# Altium PCB PCB1.PcbDoc
Units mm, origin at the board's own origin, x right, y up, seen from the top; angles counter-clockwise.
Board outline 30 x 30 mm, 2 copper layers (Top Layer, Bottom Layer); 20 components, 12 nets, 49 pads, 0 vias.
Unrouted connection lines stored in the file: 34.
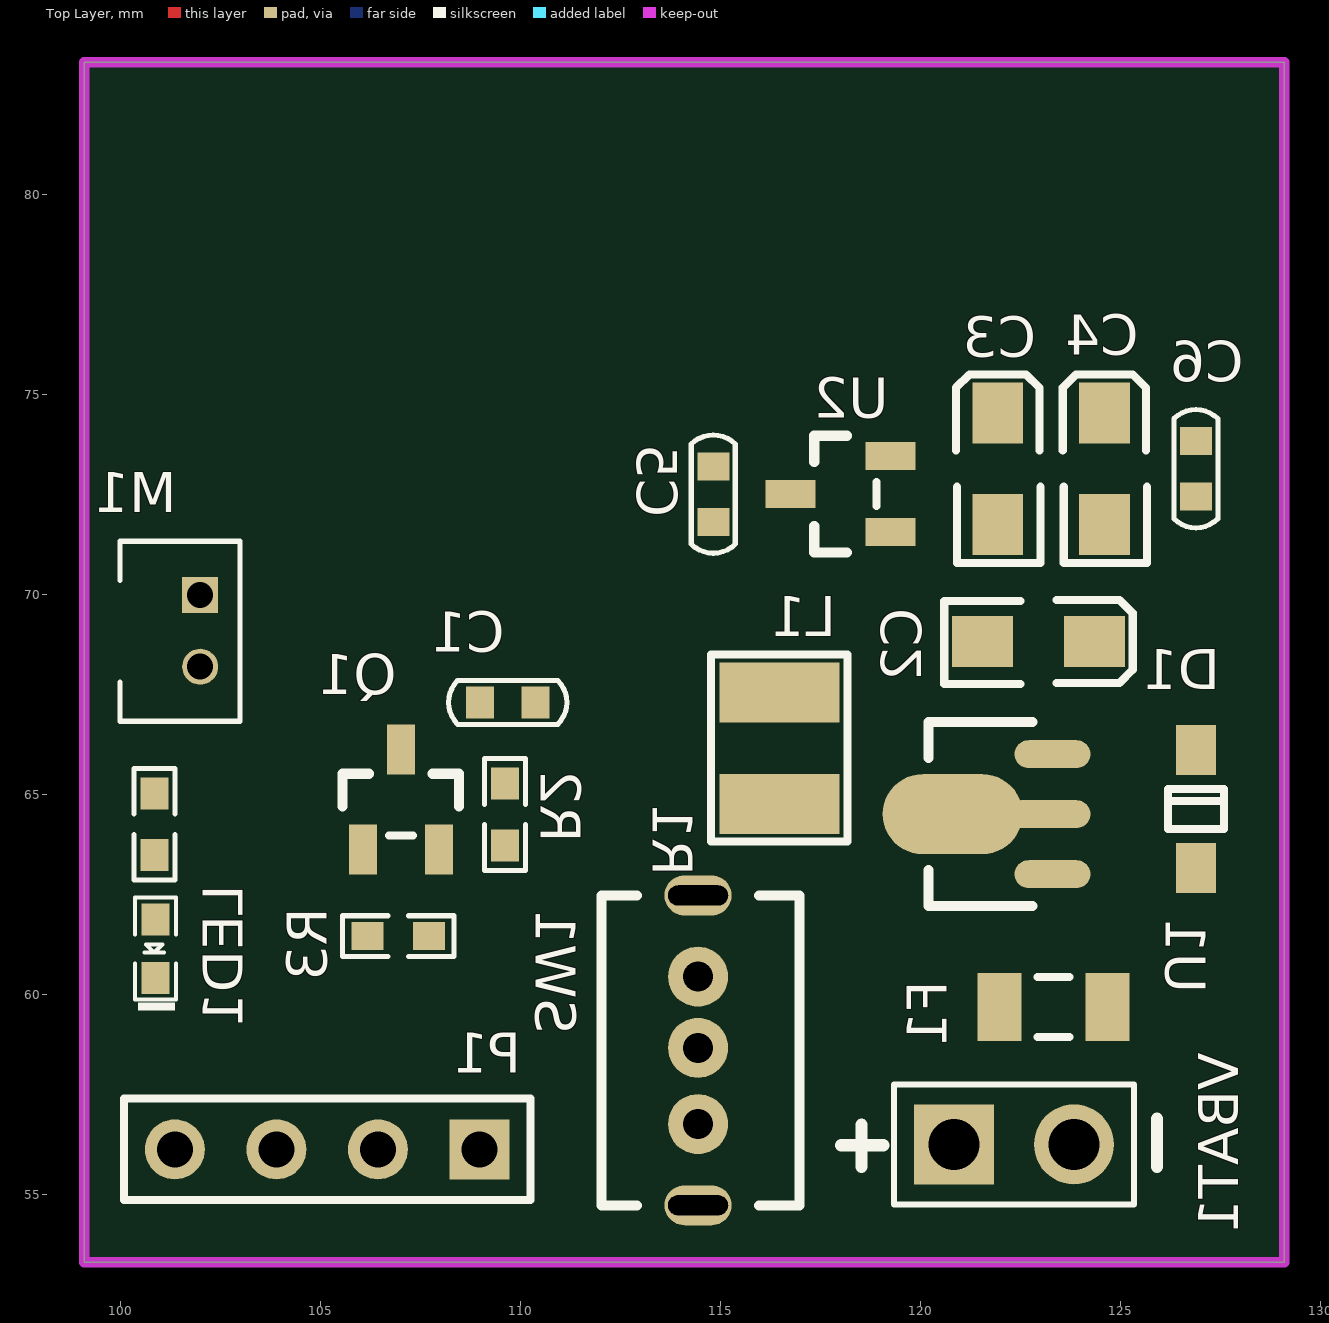
[diagram p0: Top Layer view]
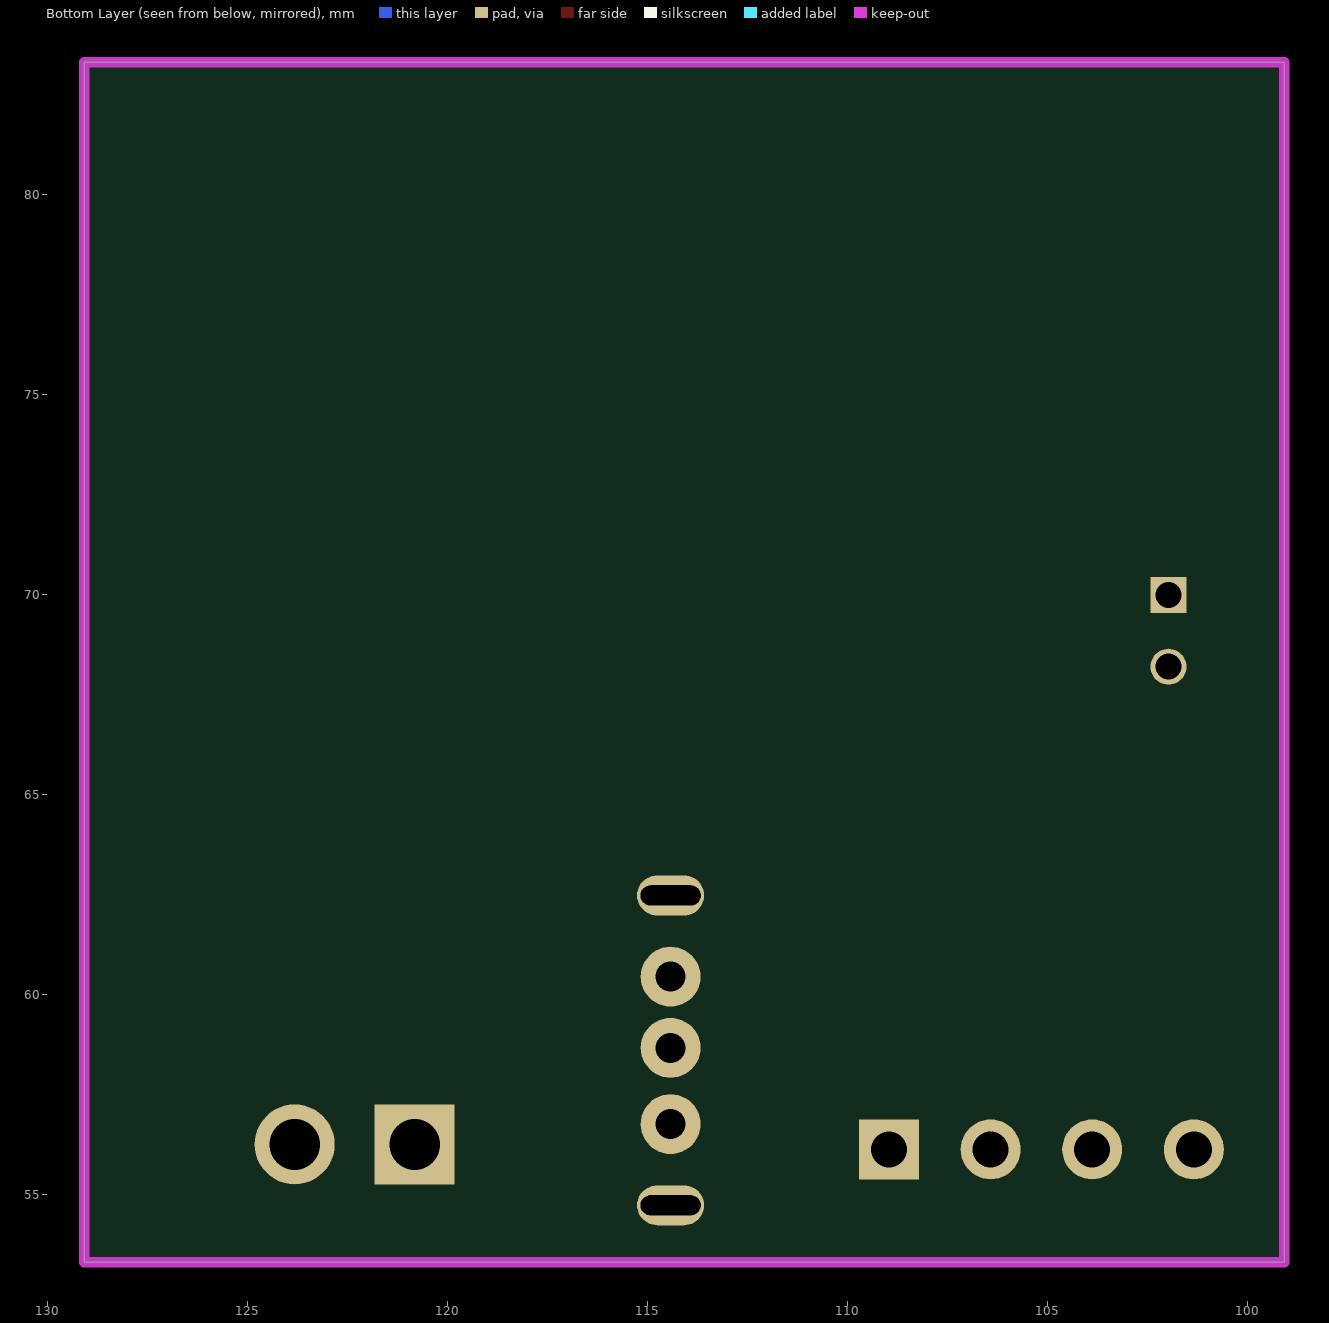
[diagram p1: Bottom Layer view, seen from below]

## Layer stack, top to bottom
Top Solder: solder mask 0.0102, Solder Resist, Dk 3.5
Top Layer: signal copper 0.0356
Dielectric 1: dielectric 0.32, FR-4, Dk 4.8
Bottom Layer: signal copper 0.0356
Bottom Solder: solder mask 0.0102, Solder Resist, Dk 3.5

## Board outline
129.084,53.312 99.084,53.312 99.084,83.312 129.084,83.312

## Design rules (kind name [scope] priority, off if disabled: settings)
Clearance [All] p1: gap=0.254 ignorepadtopadclearanceinfootprint=FALSE except(0: Arc-Hole Track-Hole SMDPad-Hole THPad-Hole Via-Hole Fill-Hole Poly-Hole Region-Hole Text-Hole)
PolygonConnect [All] p1: connectstyle=Relief reliefconductorwidth=0.254 reliefentries=4 polygonreliefangle="90 Angle" airgapwidth=0.254
RoutingVias [All] p1: holewidth=0.711 width=1.27 viastyle="Through Hole" minholewidth=0.711 minwidth=1.27 maxholewidth=0.711 maxwidth=1.27
SolderMaskExpansion [All] p1: expansion=0.102 istentingtop=FALSE
Width [All] p1: maxlimit=0.254 minlimit=0.254 preferedwidth=0.254
30 further rules are at their usual default settings.

## Components (designator, comment, footprint, x,y, rotation, side; value= is the part's Value field where it differs from the comment)
C1 "104" C_0603 109.669,67.31 r0 top
C2 "47UF" 1206 124.003,68.047 r180 top value=100pF
C3 "47UF" 1206 122.707,74.219 r270 top value=100pF
C4 "47UF" 1206 125.374,74.219 r270 top value=100pF
C5 "104" C_0603 114.808,72.517 r270 top
C6 "104" C_0603 126.873,73.152 r90 top
D1 "S4" SOD-123 126.873,64.643 r270 top
F1 "1A" C1206 123.317,59.69 r0 top
L1 "Inductor Chip" L_1210 116.459,66.167 r270 top value=47UH
LED1 "R_LED" LED-0603 100.838,61.214 r270 top
M1 "Magnet" MOTOR 101.981,69.088 r270 top
P1 "Header 4" HDR1X4 108.966,56.134 r180 top
Q1 "SI2302" SOT-23(SOT-23-3) 106.995,64.877 r270 top
R1 "10K" R_0603 100.838,64.262 r270 top
R2 "1K" R_0603 109.601,64.508 r90 top value=10K
R3 "10K" R_0603 106.934,61.468 r0 top
SW1 "SW-SPDT" SWITCH_PWR 114.427,62.484 r180 top
U1 "BL8530" SOT-89(SOT-89-3) 123.29,64.516 r0 top
U2 "662K" SOT-23(SOT-23-3) 117.983,72.517 r0 top
VBAT1 "DC4.2V" BAT 120.825,56.261 r0 top

## Footprints (in the part's own frame and the unit in brackets; to place one, negate y for a bottom-side part, rotate by r counter-clockwise, add the part's x,y. Pads: shape width x height; smd on the part's side, far side on the other; paste and mask are expansions set on the pad)
1206 [mil]
  rect 60x50 smd: 1(-13,-31) 2(97,-31)
  silkscreen extent -51,-72 135,11, body extent -21,-62 105,0, height 63
BAT [mm]
  rect 2x2 hole 1.27: 1(0,0)
  round 2 hole 1.27: 2(3,0)
  silkscreen extent -2.82,-1.5 5.08,1.5
C1206 [mm] "Chip Capacitor, Body 3.2x1.6mm, IPC High Density"
  rect 1.1x1.7 smd: 1(-1.35,0) 2(1.35,0)
  silkscreen extent -0.4,-0.75 0.4,0.75, body extent -1.7,-0.9 1.7,0.9, height 1.3
C_0603 [mm]
  rect 0.7x0.8 smd: 1(-0.694,0) 2(0.694,0)
  silkscreen extent -1.48,-0.55 1.48,0.55, body extent -0.8,-0.4 0.8,0.4
HDR1X4 [mm] "Connector; Header; 4 Position"
  rect 1.5x1.5 hole 0.9: 1(0,0)
  round 1.5 hole 0.9: 2(2.54,0) 3(5.08,0) 4(7.62,0)
  silkscreen extent -1.27,-1.27 8.89,1.27
L_1210 [mm]
  rect 1.5x3 smd: 1(-1.394,0) 2(1.394,0)
  silkscreen extent -2.34,-1.7 2.34,1.7, body extent -1.89,-1.5 1.59,1.51
LED-0603 [mm]
  rect 0.8x0.7 smd: 1(-0.668,0.025) 2(0.795,0.025)
  silkscreen extent -1.22,-0.48 1.6,0.53, body extent -0.77,-0.37 0.83,0.43, height 0.6
MOTOR [mm]
  rect 0.9x0.9 hole 0.65: 1(-0.911,0)
  round 0.9 hole 0.65: 2(0.886,0)
  silkscreen extent -2.25,-2 2.25,1, body extent -2.09,-2.01 2.11,1.19, height 5
R_0603 [mm]
  rect 0.8x0.7 smd: 1(-0.77,0) 2(0.77,0)
  silkscreen extent -1.4,-0.51 1.4,0.51, body extent -0.85,-0.4 0.85,0.4
SOD-123 [mm]
  rect 1.25x1 smd: 1(1.475,0) 2(-1.475,0)
  silkscreen extent -0.5,-0.7 0.5,0.7, body extent -1.85,-0.78 1.85,0.77, height 1.35
SOT-23(SOT-23-3) [mm]
  rect 1.25x0.7 smd: 1(1.25,0.95) 2(1.25,-0.95) 3(-1.25,0)
  silkscreen extent -0.65,-1.46 0.9,1.46, body extent -1.25,-1.5 1.15,1.5, height 1.05
SOT-89(SOT-89-3) [mm]
  oval 1.9x0.7 smd: 1(0,1.5) 3(0,-1.5)
  oval 3.5x2 smd: 2(-2.5,0)
  oval 2.1x0.7 smd: 2(-0.1,0)
  silkscreen extent -3.1,-2.3 -0.5,2.3, body extent -2.65,-2.25 1.65,2.25, height 1.51
SWITCH_PWR [mm]
  round 1.5 hole 0.75: 1(0,2.032) 2(0,3.81) 3(0,5.715)
  oval 1.676x1 hole 0.5 slot 1.5 at 0 deg: ""(0,0) ""(0,7.747)
  silkscreen extent -2.54,0 2.41,7.75, body extent -1.85,-0.44 1.85,8.06, height 6.5

## Part data
C1 C5 C6: library part CAP, "Capacitor"
C2 C3 C4: library part "Cap Pol1", "Polarized Capacitor (Radial)", LatestRevisionDate=17-Jul-2002, LatestRevisionNote="Re-released for DXP Platform.", PackageDescription="Polarized Capacitor (Radial); 2 Leads", PackageReference=RB7.6-15, Published=8-Jun-2000, Publisher="Altium Limited"
D1: library part "DIODE SCHOTTKY", "Schottky Diode"
F1: library part FUSE1, "Fuse"
L1: "Inductor", Published=8-Jun-2000, Publisher="Altium Limited", Revision="July-2002: Re-released for DXP Platform."
LED1: library part LED
M1: library part Motor, "Motor, General Kind", LatestRevisionDate=17-Jul-2002, LatestRevisionNote="Re-released for DXP Platform.", PackageDescription="Capacitor (Radial); 2 Leads", PackageReference=RB5-10.5, Published=24-Mar-1999, Publisher="Altium Limited"
P1: "Header, 4-Pin", LatestRevisionDate=17-Jul-2002, LatestRevisionNote="Re-released for DXP Platform.", Publisher="Altium Limited"
Q1: "N沟道MOSFET", PackageReference=SOT23-3, Published=8-August-2017, Publisher=mazhongwei
R1 R2 R3: library part Res2, "Resistor", LatestRevisionDate=17-Jul-2002, LatestRevisionNote="Re-released for DXP Platform.", Published=8-Jun-2000, Publisher="Altium Limited"
SW1: "SPDT Subminiature Toggle Switch, Right Angle Mounting, Vertical Actuation", ComponentLink1Description="Manufacturer Link", ComponentLink1URL=http://www.apem.com, DatasheetVersion=05-Dec-2000, LatestRevisionDate=17-Dec-2003, LatestRevisionNote="Schematic revised, PCB Footprint replaced.", PackageDescription="Switch; 4 Leads", PackageReference=TL36WW15050, Published=24-Mar-1999, Publisher="Altium Limited"
U2: library part BL8530
VBAT1: library part CON2, "Connector"

## Nets (pads, with @x,y where several pads share a name; then routed paths per layer and width w, separated by ;. In a path a pad name is that pad's centre, name@x,y a point inside that pad or via, vN(x,y) a via of type N, cw(c..) or ccw(c..) an arc to the next point about the centre after c; other vN are vias at no path point)
3.3V: C3.2 C4.2 C6.1 R1.1 U2.2
4.2V: L1.1 SW1.1
5V: C1.2 C2.2 C5.1 D1.2 M1.1 P1.1 U1.2 U2.3
BAT: F1.2 SW1.3 VBAT1.1
GND: C2.1 C3.1 C4.1 C5.2 C6.2 P1.2 Q1.2 R3.1 U1.1 U2.1 VBAT1.2
LED: LED1.2 P1.4
NetC1_1: C1.1 M1.2 Q1.3
NetD1_1: D1.1 L1.2 U1.3
NetF1_1: F1.1 SW1.2
NetLED1_1: LED1.1 R1.2
NetQ1_1: Q1.1 R2.2 R3.2
PWM: P1.3 R2.1
pads on no net: SW1.

## Keep-outs
Keep-Out Layer:
  the board outline again, w0.254